# Altium PCB AMS1117-3.3.pcbdoc
Units mil, origin at the board's own origin, x right, y up, seen from the top; angles counter-clockwise.
Board outline 852 x 761.9 mil, 2 copper layers (Top Layer, Bottom Layer), stack 0 mil thick; 1 components, 0 nets, 4 pads, 0 vias.
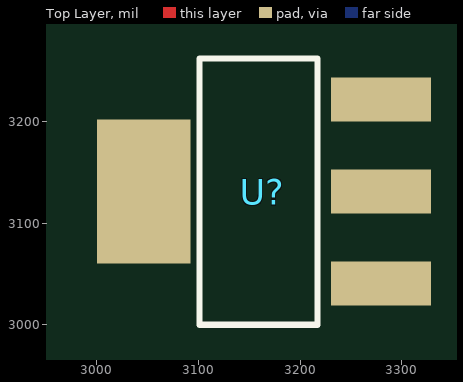
[diagram p0: Top Layer view]
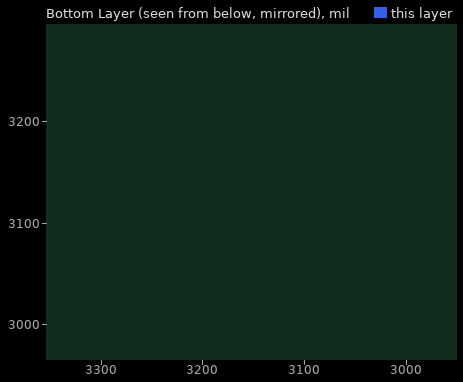
[diagram p1: Bottom Layer view, seen from below]

## Layer stack, top to bottom
Top Layer: signal copper (thickness not stored)
Bottom Layer: signal copper (thickness not stored)

## Board outline
3602,2750 2750,2750 2750,3511.9 3602,3511.9

## Components (designator, comment, footprint, x,y, rotation, side; value= is the part's Value field where it differs from the comment)
U? "AMS1117-3.3" SOT-223-3_L6.5-W3.4-P2.30-LS7.0-BR 3163,3131 r0 top

## Footprints (in the part's own frame and the unit in brackets; to place one, negate y for a bottom-side part, rotate by r counter-clockwise, add the part's x,y. Pads: shape width x height; smd on the part's side, far side on the other; paste and mask are expansions set on the pad)
SOT-223-3_L6.5-W3.4-P2.30-LS7.0-BR [mil]
  rect 98.4x43.3 smd: 1(116.9,-90.6) 2(116.9,0) 3(116.9,90.5)
  rect 92.1x141.7 smd: 4(-116.9,0)
  silkscreen extent -62,-131 54,131

## Nets (pads, with @x,y where several pads share a name; then routed paths per layer and width w, separated by ;. In a path a pad name is that pad's centre, name@x,y a point inside that pad or via, vN(x,y) a via of type N, cw(c..) or ccw(c..) an arc to the next point about the centre after c; other vN are vias at no path point)
pads on no net: U?.1 U?.2 U?.3 U?.4